# Altium PCB TE0747.PcbDoc
Units mm, origin at the board's own origin, x right, y up, seen from the top; angles counter-clockwise.
Board outline 27.57 x 11 mm, 4 copper layers (Top Layer, Signal Layer 2, Signal Layer 3, Bottom Layer), stack 0.669 mm thick; 28 components, 48 nets, 393 pads, 88 vias.
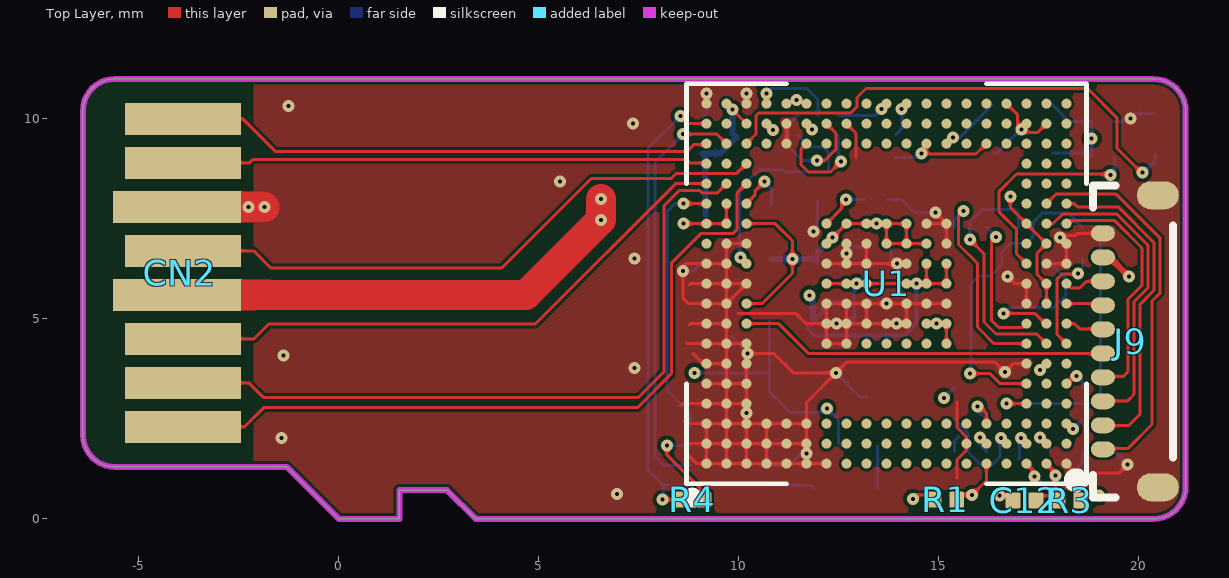
[diagram p0: Top Layer view]
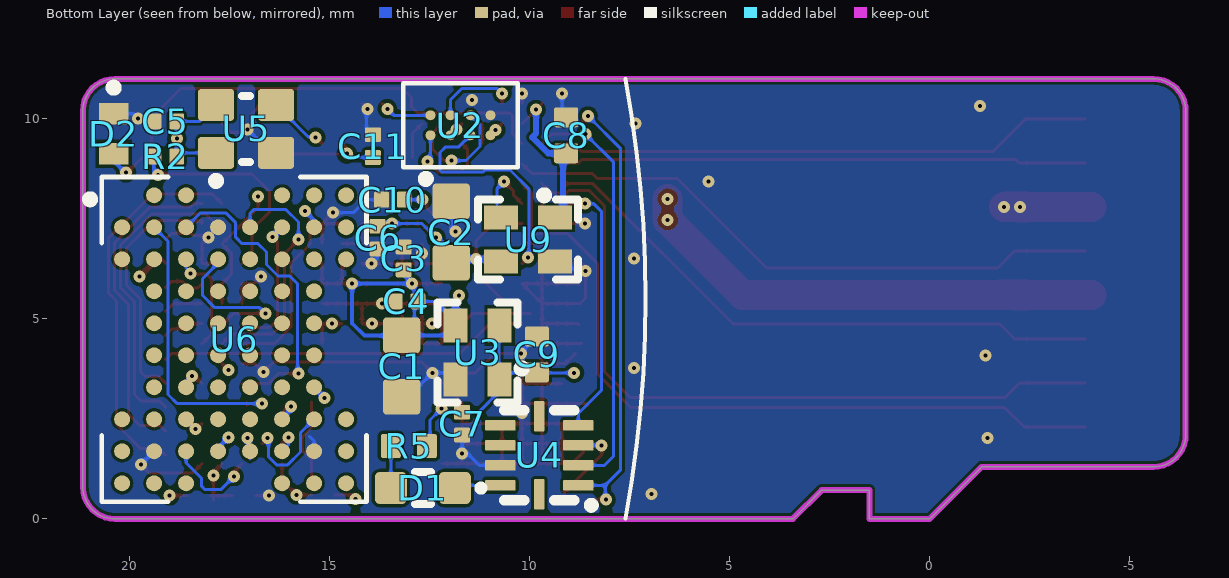
[diagram p1: Bottom Layer view, seen from below]
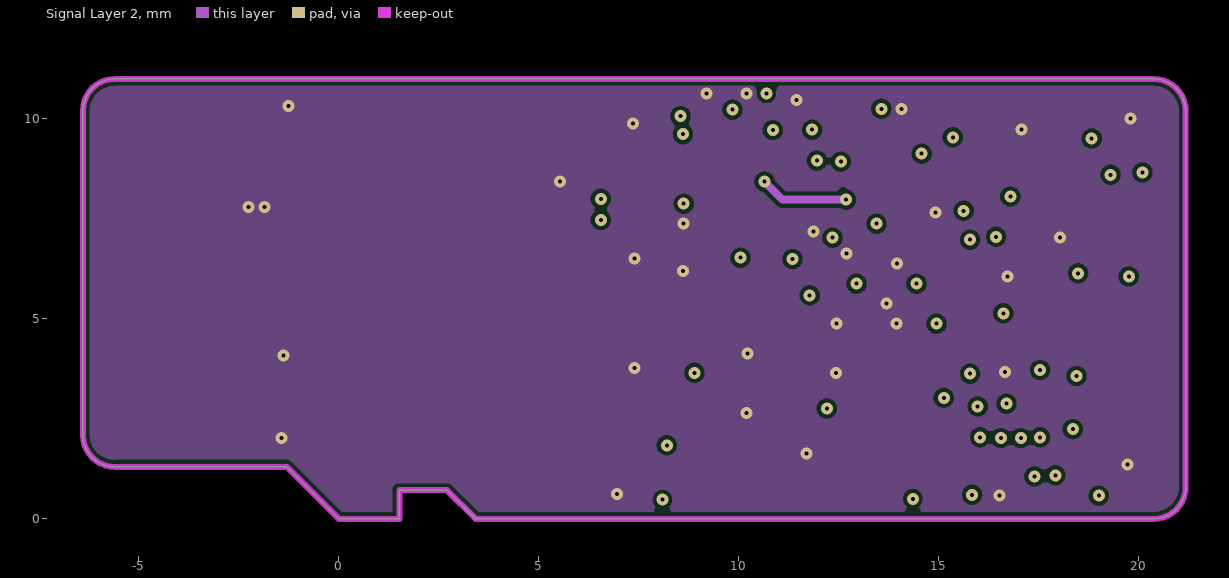
[diagram p2: Signal Layer 2]
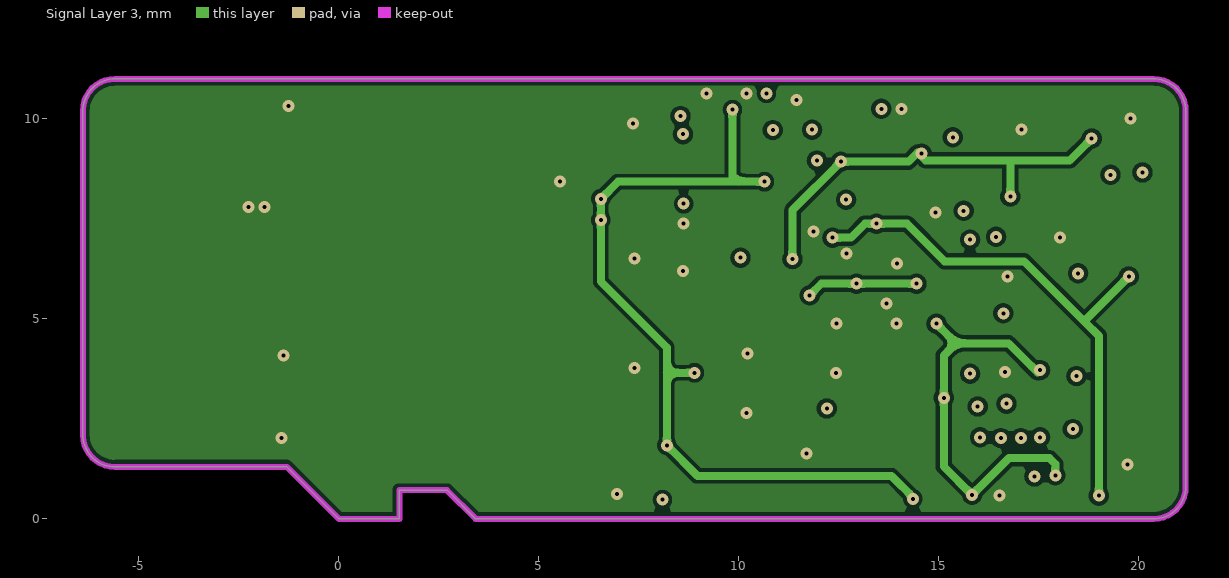
[diagram p3: Signal Layer 3]
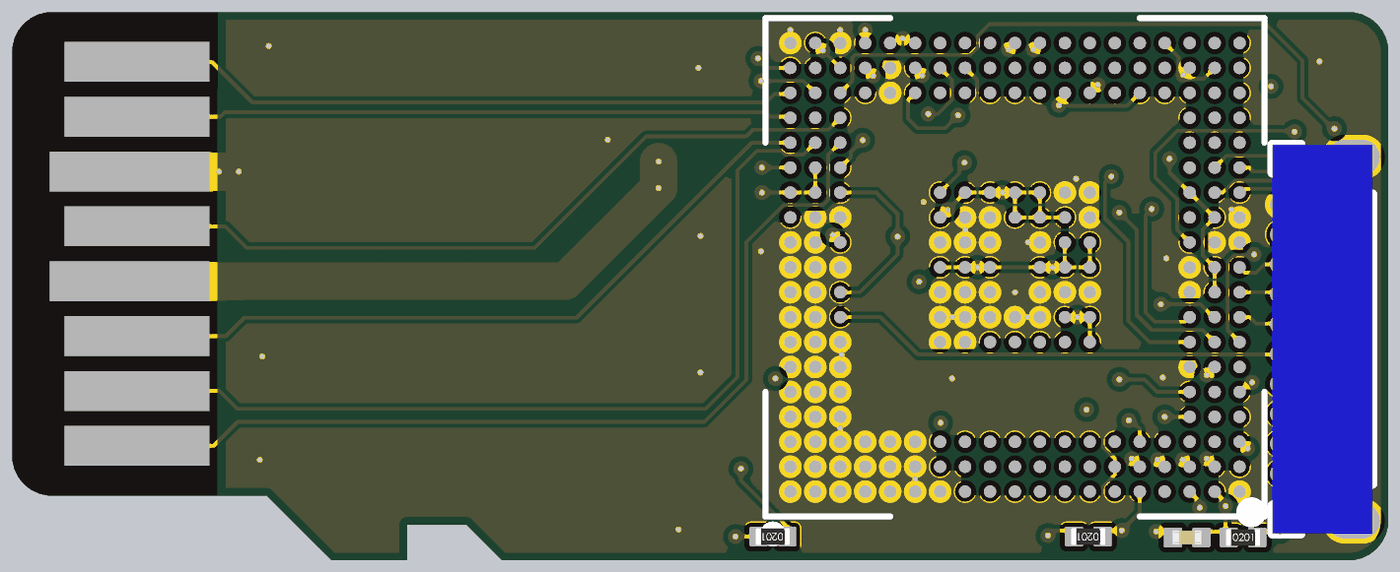
[diagram p4: 3D render of the assembled board from above, using the file's embedded part models]
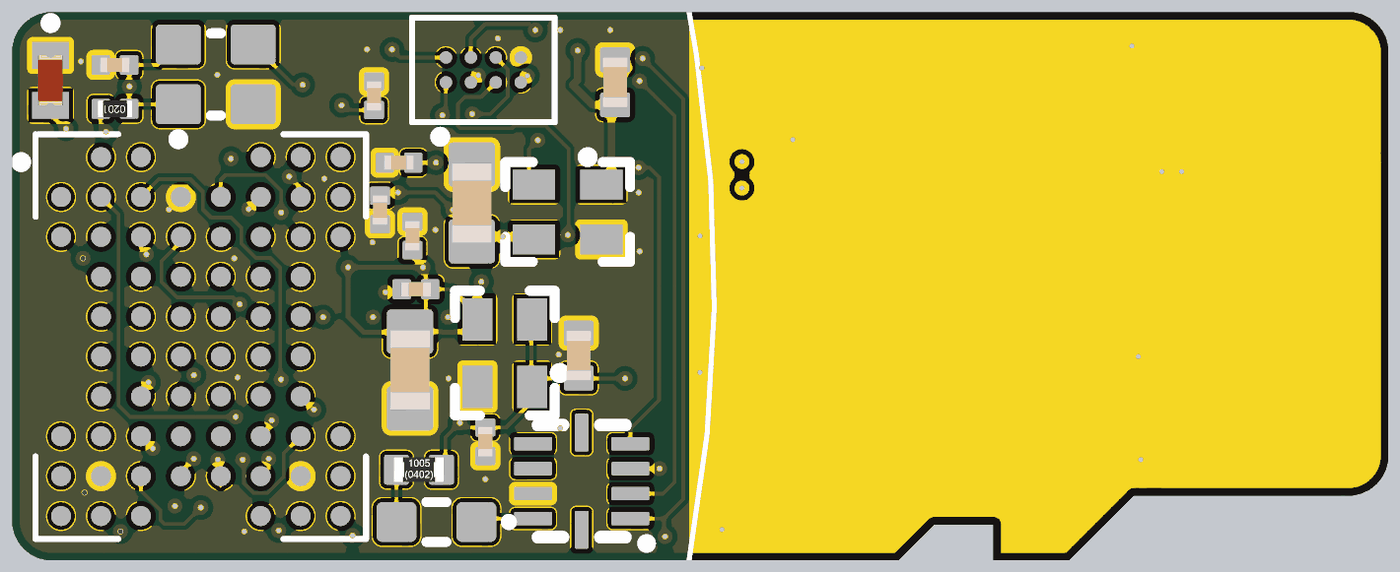
[diagram p5: 3D render of the assembled board from below, using the file's embedded part models]

## Layer stack, top to bottom
Top Solder: solder mask 0.0102, Solder Resist, Dk 3.5
Top Layer: signal copper 0.0356
Dielectric1: core 0.063, FR-4, Dk 4.2
Signal Layer 2: signal copper 0.036
Dielectric 5: prepreg 0.4, Dk 4.2
Signal Layer 3: signal copper 0.036
Dielectric 6: core 0.063, Dk 4.2
Bottom Layer: signal copper 0.0356
Bottom Solder: solder mask 0.0102, Solder Resist, Dk 3.5

## Board outline
-5.6,1.3 cw(c-5.6,2.1) -6.4,2.1 -6.4,10.2 cw(c-5.6,10.2) -5.6,11 20.37,11 cw(c20.37,10.2) 21.17,10.2 21.17,0.8 cw(c20.37,0.8) 20.37,0 3.42,0 2.7,0.72 1.51,0.72 1.51,0 0,0 -1.3,1.3

## Design rules (kind name [scope] priority, off if disabled: settings)
Clearance [OnLayer('Signal Layer 2') or OnLayer('Signal Layer 3')] p1: gap=0.1
Clearance Clearance_top [(OnLayer('Top Layer') or OnLayer('Bottom Layer')) vs IsVia] p2: gap=0.1
Clearance Clearance_Default [All] p3: gap=0.076
ComponentClearance [(InComponent('LOGO1') OR InComponent('UDLOGO1'))] p1: gap=-100 collisioncheckmode=3 verticalgap=-100 showdistances=FALSE
DiffPairsRouting [All] p1: maxlimit=0.254 minlimit=0.1 mostfreqgap=0.254 toplayer_maxgap=0.1 toplayer_prefgap=0.1 toplayer_minwidth=0.075 toplayer_maxwidth=0.381 toplayer_prefwidth=0.381 midlayer1_mingap=0.254 midlayer1_minwidth=0.381 midlayer1_maxwidth=0.381 midlayer1_prefwidth=0.381 midlayer2_mingap=0.254 midlayer2_minwidth=0.381 midlayer2_maxwidth=0.381 midlayer2_prefwidth=0.381 bottomlayer_maxgap=0.1 bottomlayer_prefgap=0.1 bottomlayer_minwidth=0.075 bottomlayer_maxwidth=0.381 bottomlayer_prefwidth=0.381 maxuncoupledlength=12.7
FabricationTestPointUsage TestPointUsage [All] p1: valid=0 allowmultiple=FALSE
FabricationTestpoint Testpoint [All] p1: side=3 testpointundercomponent=TRUE minsize=1.016 maxsize=2.54 preferedsize=1.524 minholesize=0 maxholesize=1.016 preferedholesize=0.813 testpointgrid=0.025 allowsidetop=TRUE allowsidebottom=TRUE usegrid=TRUE gridtolerance=0
FanoutControl Fanout_SOIC [IsSOIC] p3: bgadir=Out bgaviamode=Centered fanoutstyle=Rows fanoutdirection=InOnly viagrid=0.025 // Fanout_SOIC (Default Rule)
PolygonConnect [All] p1: connectstyle=Direct reliefconductorwidth=0.254 reliefentries=4 polygonreliefangle="90 Angle" airgapwidth=0.254
RoutingCorners [All] p1: cornerstyle=45-Degree minsetback=1 maxsetback=1
RoutingVias [All] p1: holewidth=0.3 width=0.7 viastyle="Through Hole" minholewidth=0.1 minwidth=0.3 maxholewidth=0.3 maxwidth=0.7
SilkToSolderMaskClearance SilkscreenOverComponentPads [IsPad] p1: minsilkscreentomaskgap=0.254 clearancetoexposedcopper=TRUE
SolderMaskExpansion [All] p1: expansion=0.102
UnpouredPolygon [All] p1: allowunpoured=FALSE
Width [All] p1: maxlimit=1 minlimit=0.075 preferedwidth=0.2 midlayer1_minwidth=0.2 midlayer1_maxwidth=0.2 midlayer2_minwidth=0.2 midlayer2_maxwidth=0.2 bottomlayer_maxwidth=0.2 minimp=50.000000 maximp=50.000000 favimp=50.000000
22 further rules are at their usual default settings.

## Classes and differential pairs
component class FPGA_B34_B35: C12 D2 J9 R1 R3 U6
component class FPGA_PWR: C3 C4 C5 C6 C7
component class FPGA_CFG: R2
component class TE0747: C1 C2 C8 C9 CN2 U3 U9
component class FPGA_B14_B16: C10 C11 D1 R4 R5 U1 U2 U4 U5

## Components (designator, comment, footprint, x,y, rotation, side; value= is the part's Value field where it differs from the comment)
C1 "22µF" CAPC1608X90N 13.2,3.82 r270 bottom
C2 "22µF" CAPC1608X90N 11.96,7.17 r90 bottom
C3 "470nF" CAPC0603X33N 13.15,6.51 r90 bottom
C4 "470nF" CAPC0603X33N 13.08,5.44 r0 bottom
C5 "470nF" CAPC0603X33N 19.11,9.94 r0 bottom
C6 "470nF" CAPC0603X33N 13.8,7.03 r270 bottom
C7 "470nF" CAPC0603X33N 11.69,2.38 r270 bottom
C8 "4.7µF" CAPC1005X60N 9.09,9.59 r90 bottom
C9 "4.7µF" CAPC1005X60N 9.82,4.11 r90 bottom
C10 "470nF" CAPC0603X33N 13.42,7.98 r0 bottom
C11 "470nF" CAPC0603X33N 13.92,9.32 r90 bottom
C12 "470nF" CAPC0603X33N 17.14,0.46 r180 top
CN2 "microSD" uSD_PCB_1mmcut_21mm -3.9,2.3 r0 top locked
D1 "Chip LED 0603 Infrared" chipLED_0603_Red 12.67,0.77 r0 bottom
D2 "LED Red SML-P11UTT86" LEDC1006X25N_RED 20.4,9.63 r90 bottom
J9 "JST-SM10B-XSRS-ETB" JST-SM10B-XSRS-ETB 19.85,4.44 r90 top
R1 "0R" RESC0603X26N 15.16,0.48 r180 top
R2 "10K" RESC0603X26N 19.11,9.06 r0 bottom
R3 "0R" RESC0603X26N 18.26,0.46 r0 top
R4 "10K" RESC0603X26N 8.84,0.48 r180 top
R5 "33R" RESC1005X40N 13.02,1.82 r180 bottom
U1 "XC7A35T-1CPG236C" XC7AxxT-CPG236 13.69,5.88 r90 top locked
U2 "N25Q016A11E5140F" BGA8C50P4X2_271X196X41B30N 11.73,9.84 r90 bottom
U3 "LXDC2HL10A-080" LXDC2HL 11.3,4.16 r0 bottom
U4 "Si1143-A11-GMR" QFN50P200X200X75-10N 9.76,1.59 r0 bottom locked
U5 "SiT8008AI-73-18S-25.000000E" 2016 17.09,9.75 r90 bottom locked
U6 "S34ML01G200GHI000" BGA67C80P10X8_800X650X100B46N 17.39,4.49 r180 bottom locked
U9 "LXDC2HL18A-052" LXDC2HL 10.04,6.99 r270 bottom

## Footprints (in the part's own frame and the unit in brackets; to place one, negate y for a bottom-side part, rotate by r counter-clockwise, add the part's x,y. Pads: shape width x height; smd on the part's side, far side on the other; paste and mask are expansions set on the pad)
2016 [mm]
  rrect20% 0.8x0.9 smd: 1(-0.6,0.75) 2(-0.6,-0.75) 3(0.6,-0.75) 4(0.6,0.75)
  silkscreen extent -1.4,-0.1 0.82,0.85, body extent -0.82,-1.02 0.82,1.03, height 0.81
BGA8C50P4X2_271X196X41B30N [mm]
  round 0.25 smd: A1(-0.25,0.75) A2(0.25,0.75) B1(-0.25,0.25) B2(0.25,0.25) C1(-0.25,-0.25) C2(0.25,-0.25) D1(-0.25,-0.75) D2(0.25,-0.75)
  silkscreen extent -1.44,-1.43 1.05,1.43, body extent -0.99,-1.37 0.99,1.37, height 0.42
BGA67C80P10X8_800X650X100B46N [mm] "BGA, 80-Leads, Body 6.50x8.00mmx1.00mm, Pitch 0.80mm"
  round 0.4 smd: A2(-2,3.6) A3(-1.2,3.6) A6(1.2,3.6) A7(2,3.6) A8(2.8,3.6) B1(-2.8,2.8) B2(-2,2.8) B3(-1.2,2.8) B4(-0.4,2.8) B5(0.4,2.8) B6(1.2,2.8) B7(2,2.8) B8(2.8,2.8) C1(-2.8,2) C2(-2,2) C3(-1.2,2) C4(-0.4,2) C5(0.4,2) C6(1.2,2) C7(2,2) C8(2.8,2) D2(-2,1.2) D3(-1.2,1.2) D4(-0.4,1.2) D5(0.4,1.2) D6(1.2,1.2) D7(2,1.2) E2(-2,0.4) E3(-1.2,0.4) E4(-0.4,0.4) E5(0.4,0.4) E6(1.2,0.4) E7(2,0.4) F2(-2,-0.4) F3(-1.2,-0.4) F4(-0.4,-0.4) F5(0.4,-0.4) F6(1.2,-0.4) F7(2,-0.4) G2(-2,-1.2) G3(-1.2,-1.2) G4(-0.4,-1.2) G5(0.4,-1.2) G6(1.2,-1.2) G7(2,-1.2) H1(-2.8,-2) H2(-2,-2) H3(-1.2,-2) H4(-0.4,-2) H5(0.4,-2) H6(1.2,-2) H7(2,-2) H8(2.8,-2) J1(-2.8,-2.8) J2(-2,-2.8) J3(-1.2,-2.8) J4(-0.4,-2.8) J5(0.4,-2.8) J6(1.2,-2.8) J7(2,-2.8) J8(2.8,-2.8) K1(-2.8,-3.6) K2(-2,-3.6) K3(-1.2,-3.6) K6(1.2,-3.6) K7(2,-3.6) K8(2.8,-3.6)
  silkscreen extent -3.7,-4.06 3.31,4.06, body extent -3.25,-4 3.25,4, height 1.01
CAPC0603X33N [mm]
  rrect20% 0.37x0.4 smd: 1(-0.285,0) 2(0.285,0)
  body extent -0.3,-0.15 0.3,0.15, height 0.29
CAPC1005X60N [mm] "Vishay VJ0402 1 x 0.5mm (+/- 0.05), 0.25mm +0.05/-0.1mm Kontakte"
  rrect20% 0.5x0.6 smd: 1(-0.45,0) 2(0.45,0)
  body extent -0.5,-0.25 0.5,0.25, height 0.5
CAPC1608X90N [mm] "Vishay VJ0603 1.6 x 0.8 (+0.15/-0.1) 0.4 +/- 0,15mm Kontakte"
  rrect20% 0.89x0.93 smd: 1(-0.77,0) 2(0.77,0)
  body extent -0.8,-0.4 0.8,0.4, height 0.8
chipLED_0603_Red [mm]
  rrect30% 0.8x0.8 smd: A(0.8,0) K(-0.8,0)
  silkscreen extent -1.49,-0.4 0.2,0.4, body extent -0.8,-0.4 0.8,0.4, height 0.7
JST-SM10B-XSRS-ETB [mm]
  oval 0.4x0.6 smd: 1(-2.7,0.75) 2(-2.1,0.75) 3(-1.5,0.75) 4(-0.9,0.75) 5(-0.3,0.75) 6(0.3,0.75) 7(0.9,0.75) 8(1.5,0.75) 9(2.1,0.75) 10(2.7,0.75)
  oval 0.7x1.05 smd: F1(-3.65,-0.625) F2(3.65,-0.625)
  silkscreen extent -3.9,-1 3.9,1.57, body extent -3.9,-1 3.9,1, height 1.44
LEDC1006X25N_RED [mm] "LED 0402, 2-Leads, Body 1,0x0,6mm, IPC Medium Density"
  rect 0.54x0.74 smd: A(-0.5,0) K(0.5,0)
  silkscreen extent 1.05,-0.1 1.25,0.1, body extent -0.5,-0.25 0.51,0.25, height 0.45
LXDC2HL [mm]
  rect 0.6x0.85 smd: 1(-0.55,0.675) 2(-0.55,-0.675) 3(0.55,-0.675) 4(0.55,0.675)
  silkscreen extent -1.2,-1.25 1,1.25, body extent -1,-1.25 1,1.25, height 1.1
QFN50P200X200X75-10N [mm] "QFN, 10-Leads, Body 2x2mm, Pitch 0.5mm"
  rrect20% 0.76x0.27 smd: 1(-0.975,0.75) 2(-0.975,0.25) 3(-0.975,-0.25) 4(-0.975,-0.75) 6(0.975,-0.75) 7(0.975,-0.25) 8(0.975,0.25) 9(0.975,0.75)
  rrect20% 0.27x0.76 smd: 5(0,-0.975) 10(0,0.975)
  silkscreen extent -1.36,-1.12 0.87,1.31, body extent -1,-1 1,1, height 0.76
RESC0603X26N [mm]
  rrect20% 0.37x0.4 smd: 1(-0.285,0) 2(0.285,0)
  body extent -0.34,-0.16 0.34,0.17, height 0.34
RESC1005X40N [mm] "Vishay D0402 1 x 0.5mm (+/- 0.05), 0.2mm +/-0.1mm Kontakte"
  rrect20% 0.5x0.6 smd: 1(-0.45,0) 2(0.45,0)
  body extent -0.5,-0.25 0.5,0.25, height 0.35
uSD_PCB_1mmcut_21mm [mm]
  rect 2.9x0.8 smd: 1(0,0) 2(0,1.1) 3(0,2.2) 5(0,4.4) 7(0,6.6) 8(0,7.7)
  rect 3.2x0.8 smd: 4(-0.15,3.3) 6(-0.15,5.5)
XC7AxxT-CPG236 [mm]
  round 0.25 smd: A1(-4.5,4.5) A2(-4,4.5) A3(-3.5,4.5) A4(-3,4.5) A5(-2.5,4.5) A6(-2,4.5) A7(-1.5,4.5) A8(-1,4.5) A9(-0.5,4.5) A10(0,4.5) A11(0.5,4.5) A12(1,4.5) A13(1.5,4.5) A14(2,4.5) A15(2.5,4.5) A16(3,4.5) A17(3.5,4.5) A18(4,4.5) A19(4.5,4.5) B1(-4.5,4) B2(-4,4) B3(-3.5,4) B4(-3,4) B5(-2.5,4) B6(-2,4) B7(-1.5,4) B8(-1,4) B9(-0.5,4) B10(0,4) B11(0.5,4) B12(1,4) B13(1.5,4) B14(2,4) B15(2.5,4) B16(3,4) B17(3.5,4) B18(4,4) B19(4.5,4) C1(-4.5,3.5) C2(-4,3.5) C3(-3.5,3.5) C4(-3,3.5) C5(-2.5,3.5) C6(-2,3.5) C7(-1.5,3.5) C8(-1,3.5) C9(-0.5,3.5) C10(0,3.5) C11(0.5,3.5) C12(1,3.5) C13(1.5,3.5) C14(2,3.5) C15(2.5,3.5) C16(3,3.5) C17(3.5,3.5) C18(4,3.5) C19(4.5,3.5) D1(-4.5,3) D2(-4,3) D3(-3.5,3) D17(3.5,3) D18(4,3) D19(4.5,3) E1(-4.5,2.5) E2(-4,2.5) E3(-3.5,2.5) E17(3.5,2.5) E18(4,2.5) E19(4.5,2.5) F1(-4.5,2) F2(-4,2) F3(-3.5,2) F17(3.5,2) F18(4,2) F19(4.5,2) G1(-4.5,1.5) G2(-4,1.5) G3(-3.5,1.5) G7(-1.5,1.5) G8(-1,1.5) G9(-0.5,1.5) G10(0,1.5) G11(0.5,1.5) G12(1,1.5) G13(1.5,1.5) G17(3.5,1.5) G18(4,1.5) G19(4.5,1.5) H1(-4.5,1) H2(-4,1) H3(-3.5,1) H7(-1.5,1) H8(-1,1) H9(-0.5,1) H10(0,1) H11(0.5,1) H12(1,1) H13(1.5,1) H17(3.5,1) H18(4,1) H19(4.5,1) J1(-4.5,0.5) J2(-4,0.5) J3(-3.5,0.5) J7(-1.5,0.5) J8(-1,0.5) J9(-0.5,0.5) J10(0,0.5) J11(0.5,0.5) J12(1,0.5) J13(1.5,0.5) J17(3.5,0.5) J18(4,0.5) J19(4.5,0.5) K1(-4.5,0) K2(-4,0) K3(-3.5,0) K7(-1.5,0) K8(-1,0) K12(1,0) K13(1.5,0) K17(3.5,0) K18(4,0) K19(4.5,0) L1(-4.5,-0.5) L2(-4,-0.5) L3(-3.5,-0.5) L7(-1.5,-0.5) L8(-1,-0.5) L9(-0.5,-0.5) L10(0,-0.5) L11(0.5,-0.5) L12(1,-0.5) L13(1.5,-0.5) L17(3.5,-0.5) L18(4,-0.5) L19(4.5,-0.5) M1(-4.5,-1) M2(-4,-1) M3(-3.5,-1) M7(-1.5,-1) M8(-1,-1) M9(-0.5,-1) M10(0,-1) M11(0.5,-1) M12(1,-1) M13(1.5,-1) M17(3.5,-1) M18(4,-1) M19(4.5,-1) N1(-4.5,-1.5) N2(-4,-1.5) N3(-3.5,-1.5) N7(-1.5,-1.5) N8(-1,-1.5) N9(-0.5,-1.5) N10(0,-1.5) N11(0.5,-1.5) N12(1,-1.5) N13(1.5,-1.5) N17(3.5,-1.5) N18(4,-1.5) N19(4.5,-1.5) P1(-4.5,-2) P2(-4,-2) P3(-3.5,-2) P17(3.5,-2) P18(4,-2) P19(4.5,-2) R1(-4.5,-2.5) R2(-4,-2.5) R3(-3.5,-2.5) R17(3.5,-2.5) R18(4,-2.5) R19(4.5,-2.5) T1(-4.5,-3) T2(-4,-3) T3(-3.5,-3) T17(3.5,-3) T18(4,-3) T19(4.5,-3) U1(-4.5,-3.5) U2(-4,-3.5) U3(-3.5,-3.5) U4(-3,-3.5) U5(-2.5,-3.5) U6(-2,-3.5) U7(-1.5,-3.5) U8(-1,-3.5) U9(-0.5,-3.5) U10(0,-3.5) U11(0.5,-3.5) U12(1,-3.5) U13(1.5,-3.5) U14(2,-3.5) U15(2.5,-3.5) U16(3,-3.5) U17(3.5,-3.5) U18(4,-3.5) U19(4.5,-3.5) V1(-4.5,-4) V2(-4,-4) V3(-3.5,-4) V4(-3,-4) V5(-2.5,-4) V6(-2,-4) V7(-1.5,-4) V8(-1,-4) V9(-0.5,-4) V10(0,-4) V11(0.5,-4) V12(1,-4) V13(1.5,-4) V14(2,-4) V15(2.5,-4) V16(3,-4) V17(3.5,-4) V18(4,-4) V19(4.5,-4) W1(-4.5,-4.5) W2(-4,-4.5) W3(-3.5,-4.5) W4(-3,-4.5) W5(-2.5,-4.5) W6(-2,-4.5) W7(-1.5,-4.5) W8(-1,-4.5) W9(-0.5,-4.5) W10(0,-4.5) W11(0.5,-4.5) W12(1,-4.5) W13(1.5,-4.5) W14(2,-4.5) W15(2.5,-4.5) W16(3,-4.5) W17(3.5,-4.5) W18(4,-4.5) W19(4.5,-4.5)
  silkscreen extent -5.47,-5 5,5, body extent -5,-5 5,5, height 1.06

## Part data
C1 C2: library part 25400, "KON 22µF 6,3V X5R SMD"
C3 C4 C5 C6 C7 C10 C11 C12: library part 24921, "KON 470nF X5R 6.3V SMD 20%"
C8 C9: library part 24719, "KON 4.7µF 6.3V X5R SMD 20%"
CN2: library part microSD_pads
D1: library part 26721
D2: library part 24212, "LED Rot SML-P11UTT86 SMD"
J9: library part 25616, "JST 10Pol. 0.6mm RA"
R1 R3: library part 26259, "WID SMD 0R 0,05W SMD"
R2 R4: library part 24914, "WID SMD 10K 1% 0,05W"
R5: library part 22770, "WID SMD 33R 1% 0,063W"
U1: library part 26752
U2: library part 26788
U3: library part 26786
U4: library part 26318
U5: library part 26674, "SiT8008AI-73-18S-25.000000E MEMS Oszillator 25MHz"
U6: library part 26787
U9: library part 26785

## Via types
v1: diameter 0.3, hole 0.1, Top Layer to Bottom Layer, tented both sides, 88 vias

## Nets (pads, with @x,y where several pads share a name; then routed paths per layer and width w, separated by ;. In a path a pad name is that pad's centre, name@x,y a point inside that pad or via, vN(x,y) a via of type N, cw(c..) or ccw(c..) an arc to the next point about the centre after c; other vN are vias at no path point)
1.0V: C1.1 C3.1 C4.1 U1.G10 U1.H10 U1.J10 U1.L10 U1.M10 U1.M11 U1.N10 U1.N11 U3.3 | length 15.9
  Top Layer w0.075: U1.G10 U1.H10 v1(12.94,5.88) U1.J10 U1.L10 v1(14.44,5.88) U1.M10 ; U1.M11 U1.M10 ; U1.N11 U1.N10 U1.M10
  Signal Layer 3 w0.2: v1(11.77,5.59) 12.06,5.88 v1(12.94,5.88) v1(14.44,5.88)
  Bottom Layer w0.075: U3.3@11.7,4.78 U3.3@11.89,4.59 ; v1(11.77,5.59) v1@11.85,5.51 ; U3.3 U3.3@11.85,4.93 ; 12.36,5.44 C4.1 ; C1.1@12.795,4.995 12.88,4.91 12.88,5.82 v1(12.94,5.88) 13.15,6.09 C3.1
  Bottom Layer w0.1: U3.3@11.7,4.78 11.85,4.93 12.36,5.44 ; U3.3@11.89,4.59 12.306,4.59 12.316,4.58 12.564,4.58 12.574,4.59 C1.1 13.21,4.58 14.13,4.58 14.44,4.89 v1(14.44,5.88) v1(12.94,5.88)
  Bottom Layer w0.15: U3.3@11.85,4.93 v1@11.85,5.51
1.8V: C2.1 C5.1 C6.1 C11.1 J9.9 R2.1 R3.2 U1.C9 U1.C13 U1.F17 U1.G12 U1.H13 U1.J13 U1.K12 U1.K13 U1.L12 U1.L13 U1.M12 U1.M17 U1.R17 U1.U13 U1.V9 U1.V10 U1.V12 U2.A1 U5.1 U5.4 U9.3 | length 48.4
  Top Layer w0.075: U1.C9 10.58,5.38 11.34,6.14 v1(11.34,6.495) 11.34,6.95 10.91,7.38 U1.C13 ; U1.F17 11.55,9.24 11.55,8.86 11.741,8.669 12.289,8.669 v1(12.55,8.93) ; U1.G12 U1.H13 U1.J13 v1(13.44,7.38) U1.K13 ; v1(14.57,9.13) 14.57,9.26 U1.M17 14.69,9.2 14.77,9.12 15.93,9.12 U1.R17 ; U1.M12 U1.L12 ; v1(16.787,8.057) 16.787,7.783 U1.U13 U1.V12 17.451,6.641 17.451,6.119 U1.V10 U1.V9 ; R3.2@18.545,0.58 v1(19,0.58) ; J9.9@19.1,6.39 19.25,6.54 J9.9@19.27,6.54 ; U1.K13 U1.K12 U1.L12 ; U1.K13 U1.L13 U1.L12
  Top Layer w0.15: J9.9@19.27,6.54 v1(19.75,6.06)
  Signal Layer 3 w0.2: v1(11.34,6.495) 11.34,7.72 v1(12.55,8.93) 14.24,8.93 14.47,9.16 14.67,8.96 16.8,8.96 ; v1(12.34,7.03) 12.8,7.03 13.15,7.38 v1(13.44,7.38) 14.2,7.38 15.14,6.44 17.13,6.44 18.64,4.93 ; v1(16.787,8.057) 16.787,8.947 16.8,8.96 ; v1(18.82,9.51) 18.27,8.96 16.8,8.96 ; v1(19,0.58) 19,4.57 18.64,4.93 ; v1(19.75,6.06) 18.64,4.95 18.64,4.93
  Bottom Layer w0.075: C2.1@11.865,6.495 C2.1 C2.1@11.96,6.65 ; v1@12.44,7.13 12.69,7.38 v1(13.44,7.38) 13.735,7.38 C6.1 ; U2.A1 12.48,9 v1(12.55,8.93) ; C11.1 14.475,9.035 v1(14.57,9.13) ; U5.1 18.735,9.15 R2.1 C5.1 18.25,9.94 U5.4
  Bottom Layer w0.15: U9.3@10.815,6.495 v1(11.34,6.495) C2.1@11.865,6.495 ; C2.1@11.96,6.65 v1@12.44,7.13
3.3V: C7.1 C8.1 C9.1 C10.1 CN2.4 R1.2 R4.1 R5.2 U1.B19 U1.C14 U1.C18 U1.G13 U3.1 U3.2 U4.3 U9.1 U9.2 | length 50.5
  Top Layer w0.075: v1(8.2,1.84) 8.2,1.6 9.125,0.675 R4.1 ; U1.B19 U1.C18 ; U1.C14 10.4,8.09 10.4,8.19 v1(10.64,8.43) ; U1.G13 12.575,7.765 12.575,7.875 v1(12.68,7.98) ; v1@14.37,0.52 14.45,0.6 R1.2@14.875,0.6
  Top Layer w0.75: CN2.4 4.68,5.6 v1(6.55,7.47) v1(6.55,8)
  Signal Layer 2 w0.2: v1(10.64,8.43) 11.09,7.98 v1(12.68,7.98)
  Signal Layer 3 w0.2: v1@8.21,1.83 v1(8.2,1.84) ; v1(8.89,3.65) 8.2,3.65 ; v1(9.84,10.23) 9.84,8.57 9.98,8.43 ; v1(10.64,8.43) 9.98,8.43 ; v1@14.37,0.52 13.815,1.075 8.965,1.075 v1(8.2,1.84) ; v1(8.2,1.84) 8.2,3.65 ; 8.2,3.65 8.2,4.28 6.55,5.93 v1(6.55,7.47) v1(6.55,8) 6.98,8.43 9.98,8.43
  Bottom Layer w0.075: v1@8.16,1.84 v1(8.2,1.84) U4.3 ; v1(8.89,3.65) U3.1@10.77,3.65 ; C8.1 C8.1@9.165,9.065 ; v1(10.64,8.43) 10.815,8.255 10.815,7.845 ; U3.2@10.77,4.95 U3.1@10.77,3.65 ; R5.2 12.49,1.9 12.49,2.47 v1(12.2,2.76) 12.105,2.665 C7.1 11.275,2.665 10.77,3.17 U3.1@10.77,3.65 ; v1(12.68,7.98) C10.1
  Bottom Layer w0.15: C8.1 9.54,9.14 9.94,9.54 9.84,9.64 v1(9.84,10.23) ; U9.1@9.165,7.61 C8.1@9.165,9.065
  other v1: 14.35,0.5
ALE: U1.U5 U6.B3 | length 7.8
  Top Layer w0.075: v1(15.78,3.63) 16.283,3.63 16.533,3.38 U1.U5
  Bottom Layer w0.075: v1@15.8,3.63 15.8,5.87 16,6.07 16.29,6.07 16.58,6.36 16.58,6.67 16.79,6.88 17.19,6.88 17.35,7.04 17.35,7.4 17.6,7.65 18.23,7.65 U6.B3
CE: U1.V7 U6.B5 | length 6.2
  Top Layer w0.075: v1(15.78,6.98) 16.13,6.63 16.13,4.92 16.43,4.62 17.45,4.62 U1.V7
  Bottom Layer w0.075: v1(15.78,6.98) 15.78,7.42 16.09,7.73 16.9,7.73 16.99,7.64 U6.B5
CLE: U1.V8 U6.C4 | length 4
  Top Layer w0.075: v1(16.61,5.14) 17.4,5.14 17.66,4.88 U1.V8
  Bottom Layer w0.075: v1(16.61,5.14) 16.75,5.28 17.87,5.28 18.18,5.59 18.18,6 17.79,6.39 U6.C4
CLK: CN2.5 U1.C16 | length 15.3
  Top Layer w0.075: CN2.5 -2.13,6.7 -1.7,6.27 4.07,6.27 6.31,8.51 8.31,8.51 8.44,8.64 9.95,8.64 U1.C16
CMD: CN2.3 U1.A15 | length 14.7
  Top Layer w0.075: CN2.3 -2.12,4.5 -1.75,4.87 4.91,4.87 8.42,8.38 U1.A15
DAT0: CN2.7 U1.A16 | length 13.2
  Top Layer w0.075: CN2.7 -2.23,8.9 -2.14,8.99 8.69,8.99 8.78,8.9 9.17,8.9 U1.A16
DAT1: CN2.8 U1.A17 | length 13.5
  Top Layer w0.075: CN2.8 -2.4,10 -1.59,9.19 8.71,9.19 8.875,9.355 9.165,9.355 U1.A17
DAT2: CN2.1 U1.C15 | length 18.8
  Top Layer w0.075: CN2.1 -2.36,2.3 -1.88,2.78 7.466,2.78 8.31,3.624 8.31,6.39 9.05,7.13 9.85,7.13 9.95,7.23 9.95,8.14 U1.C15
DAT3: CN2.2 U1.B15 | length 18.4
  Top Layer w0.075: CN2.2 -2.25,3.4 -1.89,3.04 7.49,3.04 8.13,3.68 8.13,7.83 8.515,8.215 9.018,8.215 9.091,8.142 9.451,8.142 U1.B15
DQ0: U1.W5 U6.G3 | length 0.7
  Top Layer w0.075: U1.W5 18.38,3.57 v1(18.44,3.57)
  Bottom Layer w0.075: v1(18.44,3.57) 18.59,3.42 U6.G3
DQ1: U1.W3 U6.H3 | length 0.6
  Top Layer w0.075: U1.W3 18.325,2.245 v1(18.35,2.245)
  Bottom Layer w0.075: v1(18.35,2.245) 18.35,2.25 U6.H3
DQ2: U1.U1 U6.J3 | length 2.4
  Top Layer w0.075: U1.U1 17.39,1.18 v1(17.39,1.06)
  Bottom Layer w0.075: v1(17.39,1.06) 17.72,0.73 18.115,0.73 18.2,0.815 18.2,1.01 18.59,1.4 U6.J3
DQ3: U1.V2 U6.J4 | length 0.7
  Top Layer w0.075: v1@17.51,2.06 U1.V2
  Bottom Layer w0.075: v1@17.51,2.06 17.79,1.78 U6.J4
  other v1: 17.53,2.04
DQ4: U1.U2 U6.J5 | length 0.5
  Bottom Layer w0.075: U6.J5@16.99,1.498 17.02,1.528 v1@17.02,2.01
  other v1: 17.05,2.02
DQ5: U1.R3 U6.H6 | length 1
  Top Layer w0.075: v1(15.97,2.81) 16.02,2.81 16.19,2.64 U1.R3
  Bottom Layer w0.075: v1(15.97,2.81) 15.97,2.71 U6.H6
DQ6: U1.R2 U6.J6 | length 0.7
  Top Layer w0.075: v1@15.97,2.1 v1(16.03,2.04) U1.R2
  Bottom Layer w0.075: v1(16.03,2.04) 16.03,1.85 U6.J6
DQ7: U1.T2 U6.H7 | length 2.7
  Top Layer w0.075: v1(16.55,2.02) U1.T2
  Bottom Layer w0.075: U6.H7 15.73,2.15 15.73,1.673 16.05,1.353 16.33,1.353 16.528,1.55 16.528,1.998 v1(16.55,2.02) v1@16.52,2.02
GND: C1.2 C2.2 C3.2 C4.2 C5.2 C6.2 C7.2 C8.2 C9.2 C10.2 C11.2 C12.2 CN2.6 D2.K J9.10 J9.F1 J9.F2 U1.A1 U1.A2 U1.A3 U1.A4 U1.A5 U1.A6 U1.A7 U1.A8 U1.A9 U1.A10 U1.A11 U1.A13 U1.A19 U1.B1 U1.B2 U1.B3 U1.B4 U1.B5 U1.B6 U1.B7 U1.B8 U1.B9 U1.B10 U1.B11 U1.B12 U1.B13 U1.B14 U1.C1 U1.C2 U1.C3 U1.C4 U1.C5 U1.C6 U1.C7 U1.C10 U1.C12 U1.C19 U1.D1 U1.D2 U1.D3 U1.E1 U1.E2 U1.E3 U1.E17 U1.E18 U1.E19 U1.F1 U1.F2 U1.F3 U1.F19 U1.G1 U1.G7 U1.G8 U1.G9 U1.G11 U1.H7 U1.H8 U1.H9 U1.H11 U1.H12 U1.H18 U1.J8 U1.J9 U1.J11 U1.J12 U1.K8 U1.L8 U1.L9 U1.L11 U1.L19 U1.M9 U1.M13 U1.N9 U1.N12 U1.N13 U1.P2 U1.T19 U1.U6 U1.U9 U1.U10 U1.U18 U1.V11 U1.V18 U1.W1 U1.W11 U1.W12 U2.D2 U3.4 U4.8 U5.2 U6.B4 U6.J2 U6.J7 U9.4 | length 84.5
  Top Layer w0.075: 8.54,2.83 8.59,2.88 U1.A4 U1.B4 ; v1(8.62,7.38) U1.A13 U1.B13 U1.B14 ; 8.63,2.45 8.7,2.38 U1.A3 ; 8.65,1.68 8.95,1.38 U1.A1 ; 8.69,4.4 8.71,4.38 U1.A7 U1.B7 ; 8.77,1.9 8.79,1.88 U1.A2 ; 8.77,4.85 8.8,4.88 U1.A8 U1.B8 ; 8.77,5.85 8.8,5.88 U1.A10 U1.B10 ; 8.85,4.14 9.11,3.88 U1.A6 U1.B6 ; U1.A5 U1.B5 ; U1.A19 v1(9.19,10.64) ; 9.98,5.14 11.42,5.14 11.68,4.88 U1.G8 ; U1.C12 U1.B12 U1.B11 ; U1.C19 v1(10.19,10.64) ; U1.E17 U1.E18 ; U1.G1 U1.F1 ; U1.G11 U1.H11 ; U1.H12 v1(12.69,6.63) U1.H11 ; U1.H18 12.93,9.64 12.93,9.03 ; U1.J12 U1.J11 ; v1@14.08,10.27 U1.L19 ; U1.L11 v1(13.95,6.38) U1.J11 ; U1.M13 U1.N13 ; v1(14.915,7.655) U1.N13 ; U1.N9 U1.M9 U1.L9 ; U1.N12 U1.N13 ; 15.451,1.021 15.451,1.479 15.69,1.717 U1.P2 15.69,2.043 15.451,2.281 15.451,2.919 ; v1(16.52,0.58) C12.2@16.855,0.58 ; U1.T19 16.97,10.1 16.97,9.66 17.47,9.66 U1.V18 ; v1@16.75,6.03 16.9,5.88 U1.U10 U1.U9 ; v1@17.06,9.72 17.06,9.75 U1.U18 ; U1.U6 16.86,3.88 v1(16.65,3.67) 16.4,3.92 12.7,3.92 v1(12.43,3.65) ; U1.V11 U1.W11 U1.W12 v1@17.99,7.08 ; v1@17.97,7.1 v1@17.99,7.08 ; U1.W1 18.42,1.15 19.51,1.15 v1(19.72,1.36) ; J9.10@19.1,6.99 18.95,7.14 18.47,7.14 18.41,7.08 v1@17.99,7.08 ; U1.A1 U1.B1 ; U1.A1 U1.A2 ; U1.A2 U1.B2 ; U1.A2 U1.A3 ; U1.A3 U1.B3 ; U1.B1 U1.B2 ; U1.B1 U1.C1 ; U1.B2 U1.B3 ; U1.B2 U1.C2 ; U1.B3 U1.B4 ; U1.B3 U1.C3 ; U1.B4 U1.B5 ; U1.B4 U1.C4 ; U1.B5 U1.B6 ; U1.B5 U1.C5 ; U1.B6 U1.B7 ; U1.B7 U1.B8 ; U1.B7 U1.C7 v1@10.19,4.13 ; U1.B8 U1.B9 ; U1.B9 U1.B10 ; U1.B9 U1.C10 U1.B10 ; U1.B9 U1.A9 8.74,5.38 8.6,5.52 v1(8.6,6.2) 8.6,6.31 8.67,6.38 U1.A11 U1.B11 ; U1.B10 U1.B11 ; U1.C1 U1.C2 ; U1.C1 U1.D1 ; U1.C2 U1.D2 ; U1.C2 U1.C3 ; U1.C3 U1.C4 ; U1.C3 U1.D3 ; U1.C4 U1.C5 ; U1.C5 U1.C6 v1@10.19,4.13 ; v1@10.19,4.13 10.88,4.13 11.36,3.65 v1(12.43,3.65) ; U1.D1 U1.D2 ; U1.D1 U1.E1 U1.F1 ; U1.D2 U1.E2 U1.F2 ; U1.D2 U1.D3 ; U1.D3 U1.E3 U1.F3 ; U1.F1 v1(11.69,1.63) U1.F2 ; U1.F2 U1.F3 ; U1.F3 11.69,2.91 v1(12.43,3.65) ; U1.G8 U1.G9 U1.H9 ; U1.G8 U1.G7 U1.H7 U1.H8 ; U1.G8 v1(12.44,4.88) U1.H8 ; U1.H8 U1.H9 ; U1.H8 U1.J8 ; U1.H9 U1.J9 ; U1.H11 U1.J11 ; U1.J8 U1.J9 ; U1.J8 U1.K8 U1.L8 U1.L9 ; U1.J9 v1(13.69,5.38) U1.L9
  Top Layer w0.75: CN2.6 v1(-1.86,7.8)
  Bottom Layer w0.075: v1(8.6,6.2) 8.86,6.2 9.16,6.5 U9.4@9.165,6.495 ; C8.2 9.19,10.14 v1(9.19,10.64) v1@9.15,10.6 ; C9.2 10.19,4.19 v1@10.19,4.13 ; U4.8 11.26,1.34 11.55,1.63 v1(11.69,1.63) C7.2 ; v1(11.86,7.19) 11.96,7.29 C2.2 ; U3.4@11.87,3.65 v1(12.43,3.65) 13.03,3.05 C1.2 ; v1(12.69,6.63) 12.855,6.795 C3.2 ; C10.2 14.08,7.98 14.405,7.655 v1(14.915,7.655) ; C6.2 13.8,6.53 v1(13.95,6.38) ; C11.2 14.08,9.765 v1@14.08,10.27 ; U6.J7 15.39,1.95 15.5,2.06 ; U5.2 16.46,9.15 17.03,9.72 v1@17.06,9.72 ; U6.J2 v1(19.72,1.36) ; C5.2 19.7,9.94 19.89,10.13 D2.K
  other v1: 6.95,0.62 -1.44,2.02 10.19,2.65 7.39,3.77 -1.39,4.09 10.22,4.13 13.94,4.88 16.72,6.06 7.39,6.51 18.03,7.04 -2.26,7.8 5.53,8.44 17.06,9.74 7.35,9.88 19.79,10.01 14.06,10.25 -1.26,10.32 11.44,10.47
INT: U1.A14 U4.4 | length 6.6
  Top Layer w0.075: v1@8.69,7.88 U1.A14
  Bottom Layer w0.075: v1@8.69,7.88 8.4,7.88 8.208,7.688 8.208,3.212 8.785,2.635 U4.4
  other v1: 8.62,7.88
NetD1_A: D1.A R5.1 | length 1
  Bottom Layer w0.075: D1.A R5.1
NetD1_K: D1.K U4.9 | length 1.2
  Bottom Layer w0.075: U4.9 11.8,0.84 D1.K
NetR2_2: R2.2 U1.U11 | length 5.6
  Top Layer w0.075: U1.U11 16.94,6.63 16.94,7.24 16.499,7.681 16.499,8.177 16.942,8.62 v1@19.29,8.62
  Bottom Layer w0.075: v1(19.29,8.6) 19.395,8.705 R2.2
RDY: U1.U7 U6.B7 | length 5.1
  Top Layer w0.075: v1@15.62,7.71 15.492,7.582 15.492,6.861 15.964,6.389 15.964,4.795 16.38,4.38 U1.U7
  Bottom Layer w0.075: U6.B7 15.39,7.48 v1@15.62,7.71
  other v1: 15.62,7.7
RE: U1.W7 U6.C3 | length 2.7
  Top Layer w0.075: U1.W7 17.95,4.62 17.95,5.99 18.079,6.119 18.289,6.119 18.29,6.118 18.438,6.118 v1@18.46,6.14
  Bottom Layer w0.075: v1@18.46,6.14 18.59,6.27 U6.C3
  other v1: 18.48,6.14
RLED: D2.A U1.C17 | length 12.8
  Top Layer w0.075: U1.C17 10.43,9.62 10.43,10.08 10.492,10.142 10.493,10.141 12.789,10.141 12.951,10.304 12.951,10.531 13.18,10.76 18.72,10.76 19.45,10.03 19.45,9.27 v1@20.09,8.63
  Bottom Layer w0.075: v1@20.09,8.63 20.4,8.94 D2.A
  other v1: 20.09,8.66
SCL: U1.B17 U4.2 | length 10.5
  Top Layer w0.075: v1(8.602,9.618) 9.09,9.618 9.091,9.618 9.289,9.618 9.29,9.618 9.452,9.618 U1.B17
  Bottom Layer w0.075: v1(8.602,9.618) 7.9,8.915 7.9,1.57 8.13,1.34 U4.2
SDA: R4.2 U1.A18 U4.1 | length 12
  Top Layer w0.075: v1(8.09,0.48) R4.2 ; v1(8.54,10.07) 8.73,9.88 U1.A18
  Bottom Layer w0.075: v1(8.09,0.48) 8.11,0.5 8.11,0.84 ; v1(8.54,10.07) 7.725,9.255 7.725,1.225 8.11,0.84 ; U4.1 8.11,0.84
SPI_D0: U1.D18 U2.D1 | length 0.3
  Top Layer w0.075: U1.D18 v1(10.85,9.72)
  Bottom Layer w0.075: v1(10.85,9.72) U2.D1@10.91,9.66
SPI_D1: U1.D19 U2.B2 | length 2.1
  Top Layer w0.075: U1.D19 v1(10.69,10.64)
  Bottom Layer w0.075: v1(10.69,10.64) 10.807,10.757 11.698,10.757 11.98,10.475 U2.B2
SPI_D2: U1.G18 U2.C2 | length 3.1
  Top Layer w0.075: v1(11.953,8.957) 12.147,8.957 12.428,9.237 12.428,9.28 12.428,9.281 12.428,9.479 12.428,9.48 12.428,9.642 U1.G18
  Bottom Layer w0.075: U2.C2 11.24,9.85 11.24,9.31 11.593,8.957 v1(11.953,8.957)
SPI_D3: U1.F18 U2.B1 | length 0.3
  Top Layer w0.075: U1.F18 v1@11.87,9.7
  other v1: 11.83,9.73
SPI_SCK: U1.C11 U2.C1 | length 5.8
  Top Layer w0.075: v1@10.02,6.55 U1.C11
  Bottom Layer w0.075: v1@10.02,6.55 10.02,8.25 10.49,8.72 11.11,8.72 11.161,8.669 12.199,8.669 12.24,8.71 12.24,9.16 12.1,9.3 11.77,9.3 U2.C1
  other v1: 10.04,6.53
SPI_SS: U1.K19 U2.A2 | length 1.3
  Top Layer w0.075: v1@13.58,10.27 U1.K19
  Bottom Layer w0.075: U2.A2 13.4,10.09 v1(13.56,10.25)
SYSCLK: U1.N17 U5.3 | length 1.6
  Top Layer w0.075: U1.N17 v1@15.36,9.55
  Bottom Layer w0.075: v1@15.36,9.55 15.54,9.55 U5.3
  other v1: 15.35,9.54
TCK: J9.5 U1.C8 | length 9.3
  Top Layer w0.075: U1.C8 11,4.88 11.75,4.13 18.96,4.13 J9.5@19.1,3.99
TDI: J9.8 U1.W10 | length 1.1
  Top Layer w0.075: U1.W10 18.3,5.77 18.52,5.77 18.69,5.94 18.95,5.94 J9.8@19.1,5.79
TDO: J9.6 U1.W8 | length 1
  Top Layer w0.075: U1.W8 18.39,4.88 18.52,4.75 18.94,4.75 J9.6@19.1,4.59
TMS: J9.7 U1.W9 | length 1
  Top Layer w0.075: U1.W9 18.91,5.38 J9.7@19.1,5.19
VCCIO: C12.1 R1.1 R3.1 U1.M8 U1.N7 U1.N8 U1.R1 U1.V1 U1.V6 U6.G7 | length 14.6
  Top Layer w0.075: U1.M8 v1(14.94,4.88) U1.N8 U1.N7 ; R1.1@15.445,0.6 v1(15.83,0.6) 16.19,0.96 U1.R1 ; C12.1@17.425,0.58 R3.1@17.91,0.58 ; v1@17.47,3.66 U1.V6 ; U1.V1 17.91,1.16 R3.1@17.91,0.58 ; R3.1@17.905,0.47 17.91,0.475 R3.1@17.91,0.58 ; R3.1@17.975,0.58 R3.1@17.91,0.58
  Signal Layer 3 w0.2: v1(14.94,4.88) 15.43,4.39 ; v1@17.47,3.66 16.74,4.39 15.43,4.39 ; v1(17.91,1.09) 17.91,1.37 17.76,1.52 16.75,1.52 v1(15.83,0.6) 15.125,1.305 v1(15.125,3.025) 15.125,4.085 15.43,4.39
  Bottom Layer w0.075: v1(15.125,3.025) U6.G7 U6.G7@15.36,3.29
  other v1: 17.53,3.72
WE: U1.U8 U6.B6 | length 3.5
  Top Layer w0.075: v1(16.43,7.05) 16.31,6.93 16.31,4.97 16.49,4.79 17.1,4.79 U1.U8
  Bottom Layer w0.075: U6.B6 v1(16.43,7.05)
WP: U1.U4 U6.B2 | length 7.3
  Top Layer w0.075: v1(16.69,2.88) U1.U4
  Bottom Layer w0.075: v1(16.69,2.88) 18.81,2.88 19.04,3.11 19.04,6.94 U6.B2
X0: J9.1 U1.V14 | length 9.7
  Top Layer w0.075: U1.V14 17.929,8.119 19.432,8.119 20.532,7.018 20.532,5.651 20.33,5.449 20.33,2.36 19.735,1.765 19.275,1.765 J9.1@19.1,1.59
X1: J9.2 U1.W14 | length 8.1
  Top Layer w0.075: U1.W14 18.388,7.88 18.468,7.8 19.486,7.8 20.381,6.905 ; J9.2@19.1,2.19 19.24,2.33 19.74,2.33 20.032,2.622 20.032,5.364 20.38,5.712 20.38,6.904
X2: J9.3 U1.V13 | length 7.7
  Top Layer w0.075: U1.V13 17.854,7.38 17.854,7.381 18.091,7.619 19.445,7.619 ; J9.3@19.1,2.79 19.26,2.95 19.72,2.95 19.881,3.111 19.881,5.423 19.88,5.424 19.881,5.425 19.881,5.427 20.229,5.775 20.229,6.843 19.455,7.618
X3: J9.4 U1.W13 | length 6.3
  Top Layer w0.075: U1.W13@18.262,7.452 U1.W13 18.19,7.453 19.397,7.453 20.078,6.772 20.078,5.837 19.729,5.488 19.729,5.362 19.73,5.361 19.73,3.68 19.61,3.56 19.27,3.56 J9.4@19.1,3.39
pads on no net: U1.A12 U1.B16 U1.B18 U1.D17 U1.G2 U1.G3 U1.G17 U1.G19 U1.H1 U1.H2 U1.H3 U1.H17 U1.H19 U1.J1 U1.J2 U1.J3 U1.J7 U1.J17 U1.J18 U1.J19 U1.K1 U1.K2 U1.K3 U1.K7 U1.K17 U1.K18 U1.L1 U1.L2 U1.L3 U1.L7 U1.L17 U1.L18 U1.M1 U1.M2 U1.M3 U1.M7 U1.M18 U1.M19 U1.N1 U1.N2 U1.N3 U1.N18 U1.N19 U1.P1 U1.P3 U1.P17 U1.P18 U1.P19 U1.R18 U1.R19 U1.T1 U1.T3 U1.T17 U1.T18 U1.U3 U1.U12 U1.U14 U1.U15 U1.U16 U1.U17 U1.U19 U1.V3 U1.V4 U1.V5 U1.V15 U1.V16 U1.V17 U1.V19 U1.W2 U1.W4 U1.W6 U1.W15 U1.W16 U1.W17 U1.W18 U1.W19 U4.5 U4.6 U4.7 U4.10 U6.A2 U6.A3 U6.A6 U6.A7 U6.A8 U6.B1 U6.B8 U6.C1 U6.C2 U6.C5 U6.C6 U6.C7 U6.C8 U6.D2 U6.D3 U6.D4 U6.D5 U6.D6 U6.D7 U6.E2 U6.E3 U6.E4 U6.E5 U6.E6 U6.E7 U6.F2 U6.F3 U6.F4 U6.F5 U6.F6 U6.F7 U6.G2 U6.G4 U6.G5 U6.G6 U6.H1 U6.H2 U6.H4 U6.H5 U6.H8 U6.J1 U6.J8 U6.K1 U6.K2 U6.K3 U6.K6 U6.K7 U6.K8

## Polygon pours and split planes (outlines as drawn)
GND on Signal Layer 2 "L 02-No Net" (solid, remove dead copper, pour order 4): -8.01,12.89 -8.01,-0.08 -5.98,-2.11 -5.84,-1.97 23.71,-1.97 23.71,4.6 22.14,6.17 22.14,14.95
GND on Signal Layer 3 "L 02-No Net" (solid, remove dead copper, pour order 10): -9.02,13.14 -9.02,-1.9 -7.03,-3.89 -5.31,-2.17 21.66,-2.17 24.3,0.47 24.3,14.78
GND on Bottom Layer "L 02-No Net" (solid, remove dead copper, pour order 7): -7.76,14.22 -7.76,-0.56 -5.84,-2.48 -5.77,-2.41 27.52,-2.41 27.52,13.81 25.78,15.55
GND on Top Layer "L 02-No Net" (solid, remove dead copper, pour order 9): -2.122,12.077 -2.122,-0.243 -1.252,-1.113 -0.632,-1.733 23.558,-1.733 23.558,14.947 23.488,15.017

## Keep-outs
Keep-Out Layer:
  the board outline again, w0.15

## Silkscreen, mask and mechanical layers (free items; w line width, h text height)
Bottom Overlay:
  lines w0.1: 7.608,0.004 cw(c37.1,5.5) 7.608,10.996
Top Solder:
  circle w0.4: c-5.6,2.1 r0.6
  circle w0.4: c-5.59,10.21 r0.6
  rectangle: -6.403,2.02 -2.29,10.24
  rectangle: -5.54,9.46 -2.28,11.01
  rectangle: -5.52,1.3 -2.29,2.53
  rectangle: -6.1,1.64 -5.4,2.2
  rectangle: -6.11,10.13 -5.43,10.71
Bottom Solder:
  circle w0.4: c-5.6,2.1 r0.6
  circle w0.4: c-5.6,10.22 r0.6
  rectangle: -6.407,2.21 -2.457,10.2
  rectangle: -5.46,1.3 7.61,11.01
  rectangle: -6.08,10.06 -5.29,10.68
  rectangle: -6.05,1.58 -5.19,2.46
  rectangle: 0.49,0.72 3.92,1.8
  rectangle: 3.66,0 7.61,1.5
  rectangle: 0,0 1.51,1.34
  region: 2.7,0.72 3.42,0 3.76,0 3.86,0.1 3.86,0.85
  region: -1.34,1.59 -1.34,1.34 0,0 0.35,0 0.57,0.22 0.55,0.24 0.55,1.43
Mechanical 6:
  the board outline again, w0.01

## Dimensions
-6.4,10.2 to 21.17,10.2 on Mechanical 1

## Text inside footprints (layer, text, board x,y; h text height)
D2: Mechanical 13 "K" at 20.05,10.255 h0.7 r270; Mechanical 13 "A" at 20.05,8.53 h0.7 r270